# Altium PCB Shapeoko Mill.PcbDoc (part 1 of 2)
Units mil, origin at the board's own origin, x right, y up, seen from the top; angles counter-clockwise.
Board outline 6000 x 5000 mil, 2 copper layers (Top Layer, Bottom Layer); 145 components, 165 nets, 634 pads, 190 vias.
Unrouted connection lines stored in the file: 4.
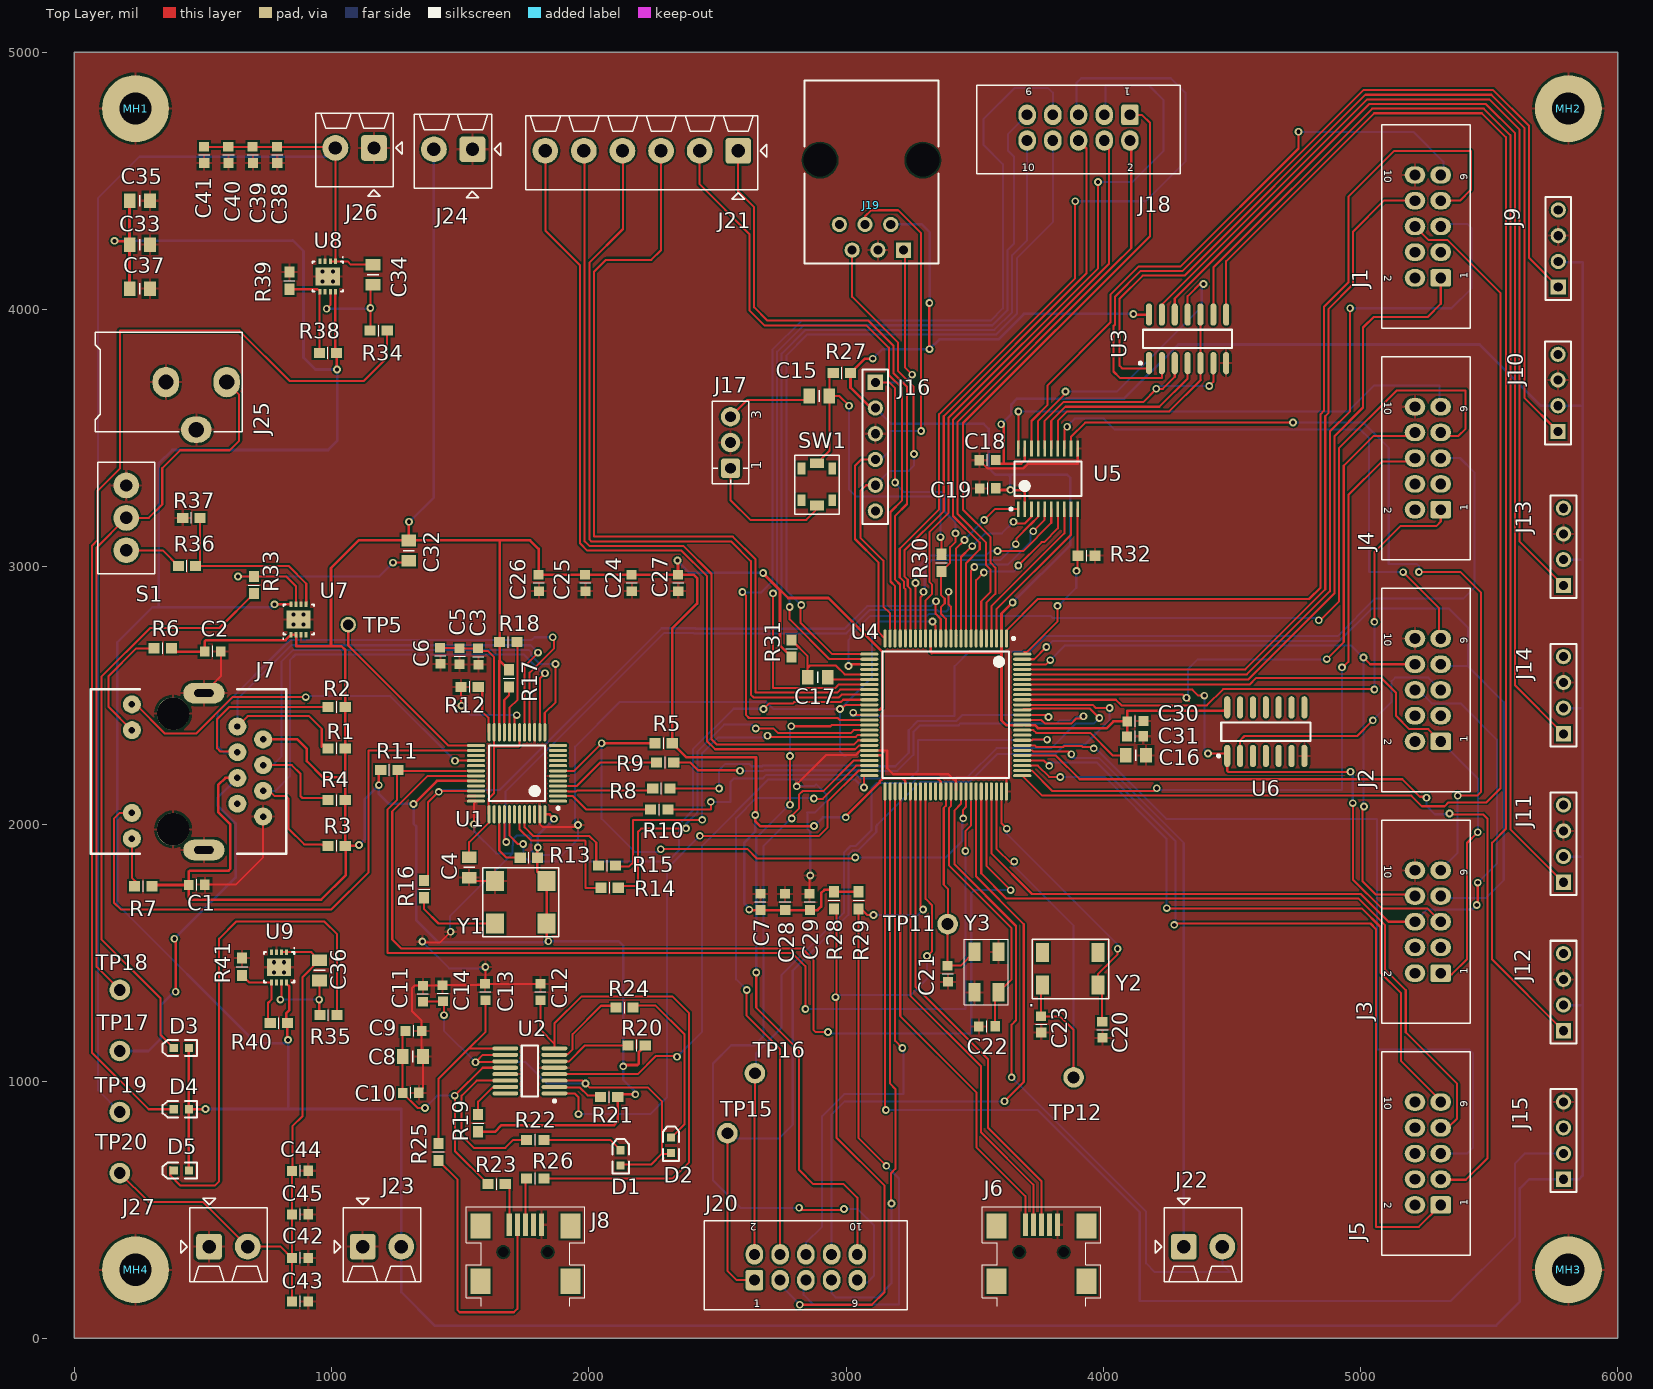
[diagram p0: Top Layer view]
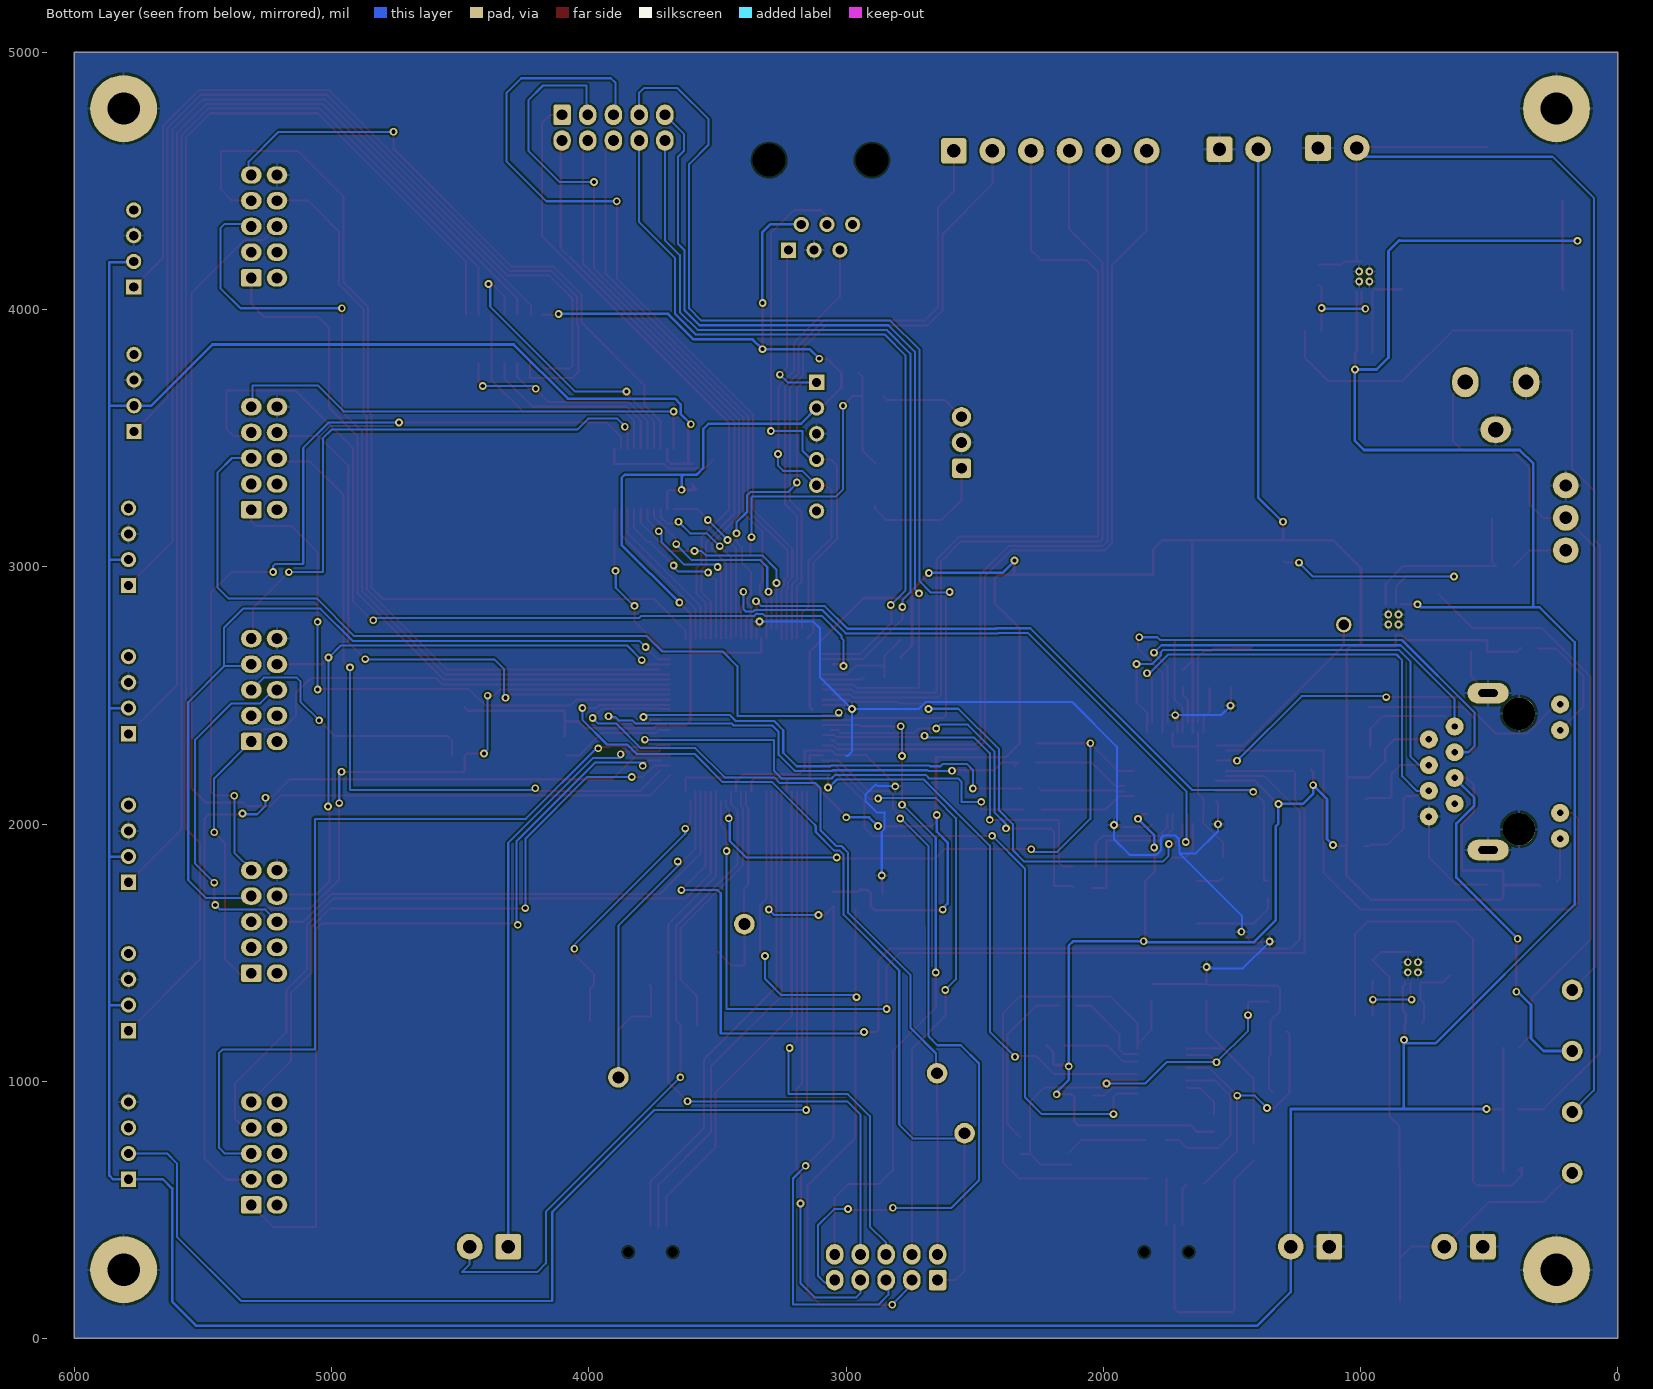
[diagram p1: Bottom Layer view, seen from below]
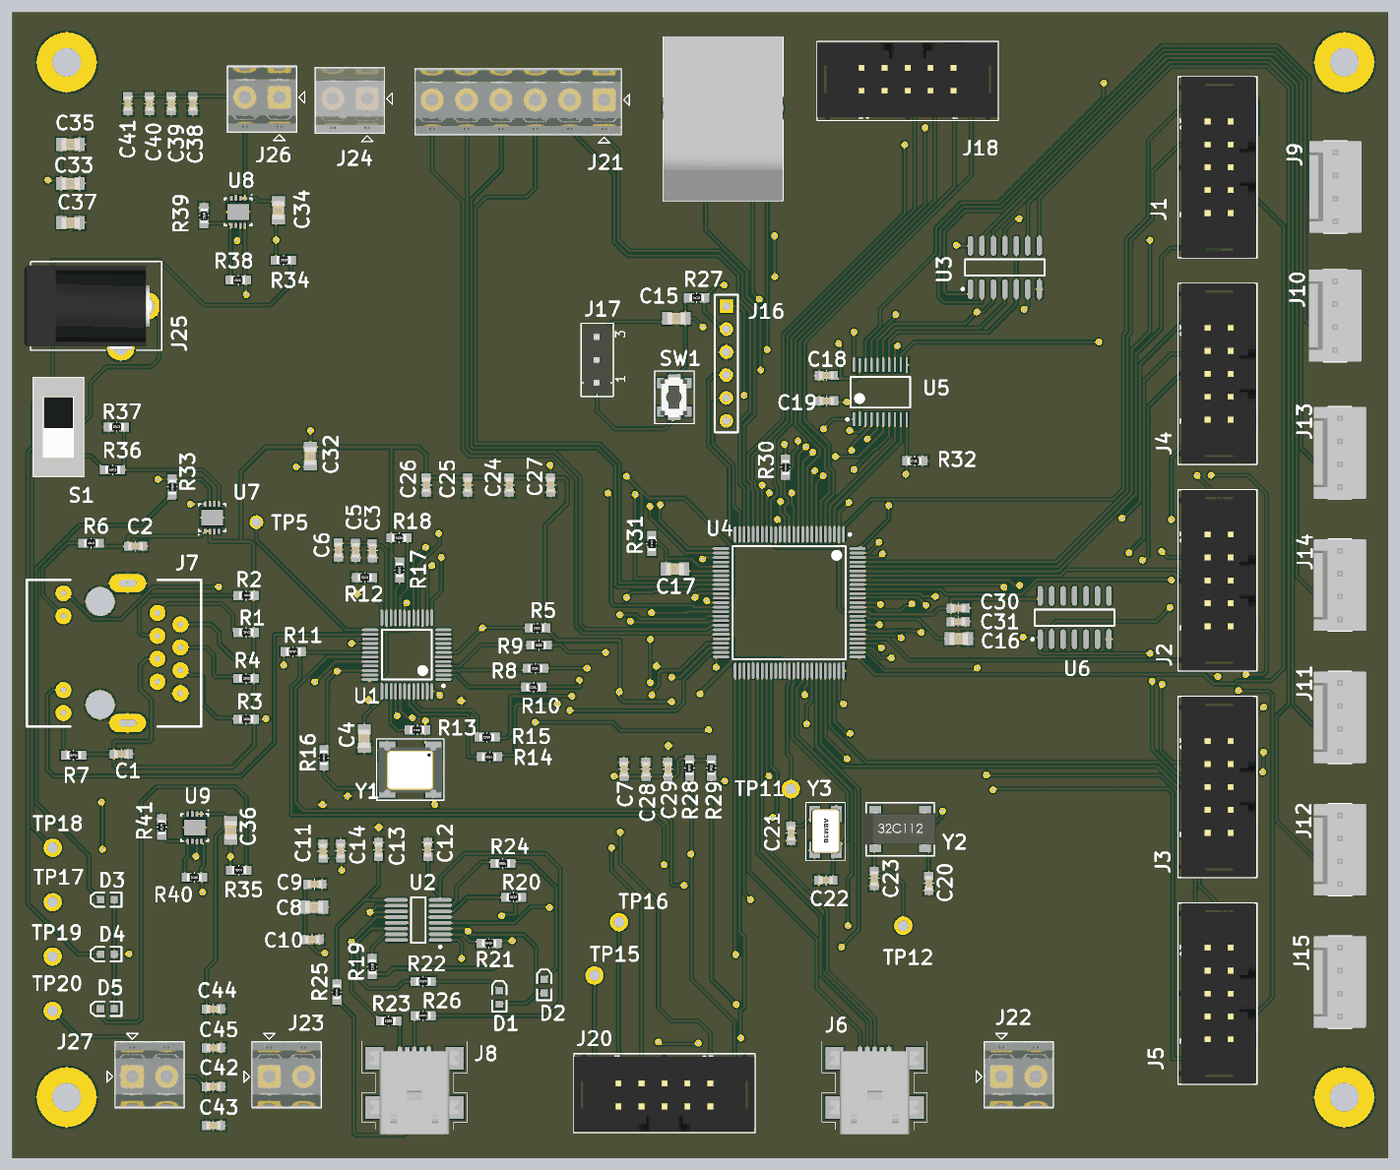
[diagram p3: 3D render of the assembled board from above, using the file's embedded part models]

## Layer stack, top to bottom
Top Solder: solder mask 0.4, Solder Resist, Dk 3.5
Top Layer: signal copper 1.4
Dielectric1: dielectric 12.6, FR-4, Dk 4.8
Bottom Layer: signal copper 1.4
Bottom Solder: solder mask 0.4, Solder Resist, Dk 3.5

## Board outline
0,0 0,5000 6000,5000 6000,0

## Design rules (kind name [scope] priority, off if disabled: settings)
Clearance [All] p1: gap=7
ComponentClearance [All] p1: gap=10 collisioncheckmode=3 verticalgap=100000 showdistances=FALSE
HoleSize [All] p1: absolutevalues=TRUE maxlimit=200 minlimit=12 maxpercent=80.000 minpercent=20.000
MinimumAnnularRing [All] p1: minimumring=7
MinimumSolderMaskSliver [All] p1 off: minsoldermaskwidth=4
PlaneConnect "Schematic Power Plane Connect Style_3" [InComponent('MH4')] p1: planeconnectstyle=Direct reliefexpansion=15 reliefentries=2 reliefconductorwidth=12 reliefairgap=10
PlaneConnect "Schematic Power Plane Connect Style_2" [InComponent('MH1')] p2: planeconnectstyle=Direct reliefexpansion=15 reliefentries=2 reliefconductorwidth=12 reliefairgap=10
PlaneConnect "Schematic Power Plane Connect Style_1" [InComponent('MH3')] p3: planeconnectstyle=Direct reliefexpansion=15 reliefentries=2 reliefconductorwidth=12 reliefairgap=10
PlaneConnect "Schematic Power Plane Connect Style" [InComponent('MH2')] p4: planeconnectstyle=Direct reliefexpansion=15 reliefentries=2 reliefconductorwidth=12 reliefairgap=10
PlaneConnect [All] p5: planeconnectstyle=Relief reliefexpansion=20 reliefentries=4 reliefconductorwidth=10 reliefairgap=10
PolygonConnect [All] p1: connectstyle=Relief reliefconductorwidth=10 reliefentries=4 polygonreliefangle="90 Angle" airgapwidth=10
RoutingVias [All] p1: holewidth=16 width=30 viastyle="Through Hole" minholewidth=12 minwidth=25 maxholewidth=28 maxwidth=50
SilkToSilkClearance [All] p1: silktosilkclearance=4
SilkToSolderMaskClearance [IsPad] p1: minsilkscreentomaskgap=4 clearancetoexposedcopper=TRUE
SolderMaskExpansion [All] p1: expansion=2
UnRoutedNet [All] p1 off:
Width Width_3v3 [InNet('3V3VCC')] p1: maxlimit=10 minlimit=10 preferedwidth=10
Width Width_5VDC [InNet('5VDC')] p2: maxlimit=10 minlimit=10 preferedwidth=10
Width [All] p3: maxlimit=15 minlimit=7 preferedwidth=8 minimp=50.000000 maximp=50.000000 favimp=50.000000
23 further rules are at their usual default settings.

## Classes and differential pairs
component class "Limit Sensor Interface": J9 J10 J11 J12 J13 J14 J15 U3
component class FTDI-USB: C1 C2 C3 C4 C5 C6 C7 C8 C9 C10 C11 C12 C13 C14 D1 D2 J6 J7 J8 R1 R2 R3 R4 R5 R6 R7 R8 R9 R10 R11 R12 R13 R14 R15 R16 R17 R18 R19 R20 R21 R22 R23 R24 R25 R26 TP5 U1 U2 Y1
component class MCU: C15 C16 C17 C18 C19 C20 C21 C22 C23 C24 C25 C26 C27 C28 C29 C30 C31 J16 J17 J18 J19 J20 J21 J22 R27 R28 R29 R30 R31 R32 SW1 TP11 TP12 TP15 TP16 U4 U5 U6 Y2 Y3
component class Power: C32 C33 C34 C35 C36 C37 C38 C39 C40 C41 C42 C43 C44 C45 D3 D4 D5 J23 J24 J25 J26 J27 R33 R34 R35 R36 R37 R38 R39 R40 R41 S1 TP17 TP18 TP19 TP20 U7 U8 U9
component class "Block Diagram": J1 J2 J3 J4 J5 MH1 MH2 MH3 MH4

## Components (designator, comment, footprint, x,y, rotation, side; value= is the part's Value field where it differs from the comment)
C1 "0.1uF" CAP_0603 476,1764 r180 top
C2 "0.1uF" CAP_0603 538,2671 r180 top
C3 "0.1uF" CAP_0603 1571,2651 r90 top
C4 "10uF" CAP_0805 1535,1831 r90 top
C5 "0.1uF" CAP_0603 1498,2652 r90 top
C6 "0.1uF" CAP_0603 1423,2654 r90 top
C7 "0.1uF" CAP_0603 2667,1697 r270 top
C8 "4.7uF" CAP_0805 1316,1096 r180 top
C9 "0.1uF" CAP_0603 1319,1196 r180 top
C10 "0.1uF" CAP_0603 1308,955 r180 top
C11 "0.1uF" CAP_0603 1355,1340 r270 top
C12 "0.047uF" CAP_0603 1812,1347 r270 top
C13 "0.047uF" CAP_0603 1597,1347 r270 top
C14 "0.1uF" CAP_0603 1432,1342 r270 top
C15 "10uF" CAP_0805 2896,3664 r180 top
C16 "10uF" CAP_0805 4127,2267 r180 top
C17 "10uF" CAP_0805 2890,2571 r180 top
C18 "0.1uF" CAP_0603 3550,3415 r180 top
C19 "0.1uF" CAP_0603 3551,3304 r0 top
C20 "11 pF" CAP_0603 3997,1200 r90 top
C21 "20pF" CAP_0603 3396,1418 r90 top
C22 "20pF" CAP_0603 3548,1213 r0 top
C23 "11 pF" CAP_0603 3759,1221 r90 top
C24 "0.1uF" CAP_0603 2167.33,2937 r90 top
C25 "0.1uF" CAP_0603 1986.67,2937 r90 top
C26 "0.1uF" CAP_0603 1806,2937 r90 top
C27 "0.1uF" CAP_0603 2348,2937 r90 top
C28 "0.1uF" CAP_0603 2762.75,1697 r270 top
C29 "0.1uF" CAP_0603 2858.5,1697 r270 top
C30 "0.1uF" CAP_0603 4125,2400 r180 top
C31 "0.1uF" CAP_0603 4124,2341 r180 top
C32 "1.0uF" CAP_0805 1300,3063 r90 top
C33 "1.0uF" CAP_0805 255,4252 r180 top
C34 "1.0uF" CAP_0805 1161.31,4135.31 r90 top
C35 "1.0uF" CAP_0805 255,4423 r180 top
C36 "1.0uF" CAP_0805 953,1431 r90 top
C37 "1.0uF" CAP_0805 255,4081 r180 top
C38 "0.1uF" CAP_0603 789,4601 r90 top
C39 "0.1uF" CAP_0603 694.33,4601 r90 top
C40 "0.1uF" CAP_0603 599.67,4601 r90 top
C41 "0.1uF" CAP_0603 505,4601 r90 top
C42 "0.1uF" CAP_0603 878,313.33 r180 top
C43 "0.1uF" CAP_0603 878,144 r180 top
C44 "0.1uF" CAP_0603 878,652 r180 top
C45 "0.1uF" CAP_0603 878,482.67 r180 top
D1 "HSMD-C190" 1.6X0.8X0.8 2124,702 r90 top
D2 "HSMD-C190" 1.6X0.8X0.8 2320,751 r90 top
D3 "HSMD-C190" 1.6X0.8X0.8 416,1129 r180 top
D4 "HSMD-C190" 1.6X0.8X0.8 416,891 r180 top
D5 "HSMD-C190" 1.6X0.8X0.8 416,653 r180 top
J1 "shrouded box header" 10P_PCB_HEADER_BRD_MNT 5262,4323 r180 top
J2 "shrouded box header" 10P_PCB_HEADER_BRD_MNT 5262,2521 r180 top
J3 "shrouded box header" 10P_PCB_HEADER_BRD_MNT 5262,1620 r180 top
J4 "shrouded box header" 10P_PCB_HEADER_BRD_MNT 5262,3422 r180 top
J5 "shrouded box header" 10P_PCB_HEADER_BRD_MNT 5262,719 r180 top
J6 "Mini-B" MUSB-05-X-B-SM-A 3760,335.5 r0 top
J7 "SI-60062-F" ETHERNET_CONN 64,2525 r270 top
J8 "Mini-B" MUSB-05-X-B-SM-A 1754,335.5 r0 top
J9 "MHDR1X4" HDR1X4 5769,4087 r90 top
J10 "MHDR1X4" HDR1X4 5768,3525.83 r90 top
J11 "MHDR1X4" HDR1X4 5789,1773.33 r90 top
J12 "MHDR1X4" HDR1X4 5789,1196.17 r90 top
J13 "MHDR1X4" HDR1X4 5789,2927.67 r90 top
J14 "MHDR1X4" HDR1X4 5789,2350.5 r90 top
J15 "MHDR1X4" HDR1X4 5789,619 r90 top
J16 "Programmer" HDR1X6 3114,3717 r270 top
J17 "1X3" 1x3POS_HEADER 2551,3483 r180 top
J18 "shrouded box header" 10P_PCB_HEADER_BRD_MNT 3904,4707 r270 top
J19 "Value" 95001-2661 3099,4891 r180 top
J20 "shrouded box header" 10P_PCB_HEADER_BRD_MNT 2844,277 r90 top
J21 "Stackable ScrewTerm" 6P_PCB_ScrewTerm_90S_3.81MM 2581,4617 r90 top
J22 "Stackable ScrewTerm" 2P_PCB_ScrewTerm_90S_3.81MM 4313,357 r270 top
J23 "Stackable ScrewTerm" 2P_PCB_ScrewTerm_90S_3.81MM 1121,357 r270 top
J24 "Stackable ScrewTerm" 2P_PCB_ScrewTerm_90S_3.81MM 1548,4623 r90 top
J25 "CONN_PWR_JACK_2.1x5.5mm" CONN_PWR_JACK_2.1x5.5mm 53,3718 r90 top
J26 "Stackable ScrewTerm" 2P_PCB_ScrewTerm_90S_3.81MM 1165,4628 r90 top
J27 "Stackable ScrewTerm" 2P_PCB_ScrewTerm_90S_3.81MM 524,357 r270 top
MH1 "MH_Plated_125mil" "MH_PLATED_125 ID X 260MIL OD" 238,4781 r90 top
MH2 "MH_Plated_125mil" "MH_PLATED_125 ID X 260MIL OD" 5808,4781 r0 top
MH3 "MH_Plated_125mil" "MH_PLATED_125 ID X 260MIL OD" 5808,267 r0 top
MH4 "MH_Plated_125mil" "MH_PLATED_125 ID X 260MIL OD" 238,267 r0 top
R1 "49.9" RES_0603 1020,2294 r0 top
R2 "49.9" RES_0603 1020,2455 r0 top
R3 "49.9" RES_0603 1020,1915 r0 top
R4 "49.9" RES_0603 1020,2093 r0 top
R5 "1.5K" RES_0603 2291,2314 r180 top
R6 "249" RES_0603 344,2683 r0 top
R7 "249" RES_0603 268,1758 r0 top
R8 "33" RES_0603 2282,2138 r180 top
R9 "33" RES_0603 2297,2239 r180 top
R10 "33" RES_0603 2274,2056 r180 top
R11 "1.5K" RES_0603 1225,2210 r0 top
R12 "4.87K" RES_0603 1537,2533 r0 top
R13 "2.2K" RES_0603 1767,1869 r180 top
R14 "33" RES_0603 2081,1752 r180 top
R15 "33" RES_0603 2071,1838 r180 top
R16 "33" RES_0603 1360,1747 r90 top
R17 "2.2K" RES_0603 1690,2566 r90 top
R18 "2.2K" RES_0603 1687,2707 r180 top
R19 "10K" RES_0603 1570,837 r270 top
R20 "10K" RES_0603 2186,1139 r0 top
R21 "10K" RES_0603 2079,938 r0 top
R22 "100" RES_0603 1792,772 r0 top
R23 "0" RES_0603 1642,600 r180 top
R24 "100" RES_0603 2139,1286 r0 top
R25 "27" RES_0603 1416,725 r90 top
R26 "27" RES_0603 1792,622 r0 top
R27 "10K" RES_0603 2984,3753 r0 top
R28 "2.2K" RES_0603 2953.25,1703 r90 top
R29 "2.2K" RES_0603 3049,1703 r90 top
R30 "470" RES_0603 3371,3015 r270 top
R31 "10" RES_0603 2788,2682 r270 top
R32 "1.0K" RES_0603 3935,3043 r180 top
R33 "100" RES_0603 698,2929 r270 top
R34 "100" RES_0603 1183,3918 r0 top
R35 "100" RES_0603 988,1257 r0 top
R36 "100K" RES_0603 438,3003 r0 top
R37 "100K" RES_0603 455,3190 r0 top
R38 "100K" RES_0603 986,3831 r180 top
R39 "100K" RES_0603 836.31,4112.31 r270 top
R40 "100K" RES_0603 795,1226 r180 top
R41 "100K" RES_0603 652,1445 r270 top
S1 "ON-ON" SWITCH_SPDT_SLIDER 202,3190 r270 top
SW1 "Value" TL1015_TACT_SWITCH 2887,3320 r90 top
TP5 "ValueValueAux" TP 1065,2775 r0 top
TP11 "TESTPOINT_LEAD" THP_D46_T80_B80 3395,1611 r90 top
TP12 "TESTPOINT_LEAD" THP_D46_T80_B80 3885,1015 r180 top
TP15 "TESTPOINT_LEAD" THP_D46_T80_B80 2539,798 r180 top
TP16 "TESTPOINT_LEAD" THP_D46_T80_B80 2646,1031 r90 top
TP17 "TESTPOINT_LEAD" THP_D46_T80_B80 177,1117.67 r270 top
TP18 "TESTPOINT_LEAD" THP_D46_T80_B80 177,1355 r270 top
TP19 "TESTPOINT_LEAD" THP_D46_T80_B80 177,880.33 r0 top
TP20 "TESTPOINT_LEAD" THP_D46_T80_B80 177,643 r0 top
U1 "DP83848CVV/NOPB" VBH48A_N 1721,2197 r180 top
U2 "FT230XS-R" SSOP-16_M 1771,1040 r180 top
U3 "CD4071BCM" M14A_N 4328,3886 r90 top
U4 "PIC32MX795F512L-80V/PF" TQFP-PF100_N 3388,2424 r270 top
U5 "TXB0108PWR" TSSOP-20 3785,3342 r90 top
U6 "CD4069UBCM" M14A_N 4632,2359 r90 top
U7 "ADP7104ACPZ-3.3-R7" ADI-CP-8-5_V 872,2795 r90 top
U8 "ADP7104ACPZ-2.5-R7" ADI-CP-8-5_V 985.31,4128.31 r270 top
U9 "ADP7104ACPZ-1.8-R7" ADI-CP-8-5_V 796,1443 r270 top
Y1 "50MHz" K50-3C 1736,1696 r180 top
Y2 "32kHz" 4-SOJ_5.5MM_PITCH 3872,1437 r0 top
Y3 "8MHz" ABM3B_XTAL 3499,1503 r270 top

## Footprints (in the part's own frame and the unit in brackets; to place one, negate y for a bottom-side part, rotate by r counter-clockwise, add the part's x,y. Pads: shape width x height; smd on the part's side, far side on the other; paste and mask are expansions set on the pad)
1.6X0.8X0.8 [mm] "SM LED; 2 Flat Leads"
  rect 0.8x0.8 smd: 1(-0.75,0) 2(0.75,0)
  silkscreen extent -1.55,-0.8 1.85,0.8
1x3POS_HEADER [mil] "Connector Header, Single-row 3-position, 0.100\" pitch"
  rrect25% 75x75 hole 42: 1(0,100)
  round 75 hole 42: 2(0,0) 3(0,-100)
  silkscreen extent -70,-160 70,160, body extent -57,-150 57,150, height 335
2P_PCB_ScrewTerm_90S_3.81MM [mil] "TERM BLOCK 2POS SIDE ENT STACKABLE 3.81MM"
  rrect25% 100x100 hole 52: 1(0,0)
  round 100 hole 52: 2(0,150)
  silkscreen extent -188,-110 136,226, body extent -152,-75 136,225, height 335
4-SOJ_5.5MM_PITCH [mm]
  rect 1.3x1.9 smd: 1(-2.75,-1.6) 2(2.75,-1.6) 3(2.75,1.6) 4(-2.75,1.6)
  silkscreen extent -3.77,-2.98 3.77,2.9, body extent -3.97,-1.85 3.93,1.85, height 2.44
6P_PCB_ScrewTerm_90S_3.81MM [mil] "TERM BLOCK 6POS SIDE ENT STACKABLE 3.81MM"
  rrect25% 100x100 hole 52: 1(0,0)
  round 100 hole 52: 2(0,150) 3(0,300) 4(0,450) 5(0,600) 6(0,750)
  silkscreen extent -188,-110 136,825, body extent -152,-75 136,825, height 335
10P_PCB_HEADER_BRD_MNT [mil] "HEADER BRD MNT 10POS 2.54MM"
  round 40 on Mech15: 0(0,0)
  rrect25% 80x68 hole 42: 1(-50,200)
  oval 80x68 hole 42: 2(50,200) 3(-50,100) 4(50,100) 5(-50,0) 6(50,0) 7(-50,-100) 8(50,-100) 9(-50,-200) 10(50,-200)
  silkscreen extent -165,-395 180,395, body extent -162,-394 178,394, height 390
95001-2661 [mm] "Connector; PCB Jack, Thru-Hole; 1-Port, 6 Positions, 6 Loaded; Unshielded without Lightpipes; Right Angle"
  rect 1.5x1.5 hole 0.9: 1(-3.175,16.77)
  round 1.5 hole 0.9: 2(-1.905,14.23) 3(-0.635,16.77) 4(0.635,14.23) 5(1.905,16.77) 6(3.175,14.23)
  round 2.95 hole 3.25 unplated: MH1(-5.08,7.88) MH2(5.08,7.88)
  silkscreen extent -6.6,0 6.6,18.1, body extent -6.67,-0.05 6.67,18.11, height 12.57
ABM3B_XTAL [mm]
  rect 1.8x1.2 smd: 1(0,0) 2(4,0) 3(4,2.4) 4(0,2.4)
  silkscreen extent -1.25,-0.97 5.2,3.35, body extent -0.59,-0.38 4.4,2.82, height 1.11
ADI-CP-8-5_V [mm] "SON, 8-Leads, Body 3x3mm, Pitch 0.5mm, Thermal Pad 1.74x2.38mm"
  rect 0.55x0.3 smd mask+0.102: 1(-1.5,0.75) 2(-1.5,0.25) 3(-1.5,-0.25) 4(-1.5,-0.75) 5(1.5,-0.75) 6(1.5,-0.25) 7(1.5,0.25) 8(1.5,0.75)
  rect 1.74x2.38 smd mask+0.102: 9(0,0)
  silkscreen extent -1.95,-1.5 1.5,1.55, body extent -1.5,-1.5 1.5,1.5, height 0.8
CAP_0603 [mm]
  rect 0.95x1 smd: 1(-0.8,0) 2(0.8,0.025)
  silkscreen extent 0,-0.55 0,0.55, body extent -0.8,-0.39 0.8,0.41, height 0.82
CAP_0805 [mm]
  rect 1.15x1.45 smd: 1(-1,0) 2(1,0)
  silkscreen extent 0,-0.55 0,0.55, body extent -1,-0.61 1,0.64, height 0.62
CONN_PWR_JACK_2.1x5.5mm [mm] "Power Connector, 2.1mm ID, 5.5mm OD"
  oval 3x2.6 hole 1.511: 1(0,-13.7) 2(0,-7.7)
  oval 2.6x3 hole 1.511: 3(-4.7,-10.7)
  silkscreen extent -4.9,-15.22 4.92,-0.7, body extent -4.9,-14.1 4.5,0, height 11
ETHERNET_CONN [mil]
  round 70 hole 25: 1(146,570) 2(196,670) 3(246,570) 4(296,670) 5(346,570) 6(396,670) 7(446,570) 8(496,670) 9(60,160) 10(160,160) 11(482,160) 12(582,160)
  oval 80x160 hole 30 slot 75 at 90 deg: 13(16,440) 14(626,440)
  round 126 hole 126: MH(96,320) MH(546,320)
  silkscreen extent 1,0 641,760
HDR1X4 [mm] "Connector; Header; 4 Position"
  rect 1.5x1.5 hole 0.9: 1(0,0)
  round 1.5 hole 0.9: 2(2.54,0) 3(5.08,0) 4(7.62,0)
  silkscreen extent -1.27,-1.27 8.89,1.27, body extent -1.27,-2.9 8.89,2.9, height 11.64
HDR1X6 [mm] "Connector; Header; 6 Position"
  rect 1.5x1.5 hole 0.9: 1(0,0)
  round 1.5 hole 0.9: 2(2.54,0) 3(5.08,0) 4(7.62,0) 5(10.16,0) 6(12.7,0)
  silkscreen extent -1.27,-1.27 13.97,1.27
K50-3C [mm]
  rect 1.8x2 smd: 1(-2.54,-2.1) 2(2.54,-2.1) 3(2.54,2.1) 4(-2.54,2.1)
  silkscreen extent -3.72,-3.4 3.75,3.4, body extent -3.5,-2.45 3.5,2.55, height 1.51
M14A_N [mm] "SOIC, 14-Leads, Body 8.6x3.9mm, Pitch 1.27mm, IPC Medium Density"
  oval 2.2x0.6 smd: 1(-2.4,3.81) 2(-2.4,2.54) 3(-2.4,1.27) 4(-2.4,0) 5(-2.4,-1.27) 6(-2.4,-2.54) 7(-2.4,-3.81) 8(2.4,-3.81) 9(2.4,-2.54) 10(2.4,-1.27) 11(2.4,0) 12(2.4,1.27) 13(2.4,2.54) 14(2.4,3.81)
  silkscreen extent -2.52,-4.4 0.9,4.78, body extent -2,-4.38 2,4.38, height 1.75
"MH_PLATED_125 ID X 260MIL OD" [mil]
  round 260 hole 125: MH(0,0)
MUSB-05-X-B-SM-A [mm]
  rect 0.5x2.25 smd mask+0.05: 1(-1.6,2.708) 2(-0.8,2.708) 3(0,2.708) 4(0.8,2.708) 5(1.6,2.708)
  rect 2x2.5 smd mask+0.05: 6(-4.45,2.583) 7(-4.45,-2.867) 8(4.45,2.583) 9(4.45,-2.867)
  round 0 hole 1 unplated: 10(-2.2,0.008) 11(2.2,0.008)
  silkscreen extent -5.83,-5.34 5.83,4.47, body extent -4.95,-5.84 4.95,3.66, height 4.03
RES_0603 [mm]
  rect 1.1x1 smd: 1(-0.85,0) 2(0.85,0)
  silkscreen extent 0,-0.55 0,0.55, body extent -0.77,-0.37 0.83,0.43, height 0.47
SSOP-16_M [mm] "SOP, 16-Leads, Body 4.9x3.9mm, Pitch 0.635mm, IPC Low Density"
  oval 2.55x0.4 smd: 1(-2.425,2.222) 2(-2.425,1.587) 3(-2.425,0.952) 4(-2.425,0.317) 5(-2.425,-0.318) 6(-2.425,-0.953) 7(-2.425,-1.588) 8(-2.425,-2.223) 9(2.425,-2.222) 10(2.425,-1.587) 11(2.425,-0.952) 12(2.425,-0.317) 13(2.425,0.318) 14(2.425,0.953) 15(2.425,1.588) 16(2.425,2.223)
  silkscreen extent -2.55,-2.5 0.8,3.1, body extent -1.99,-2.5 1.99,2.5, height 1.76
SWITCH_SPDT_SLIDER [mil] "TE Connectivity SLS121PC04 SPDT slider"
  round 100 hole 48: 1(-126,0) 2(0,0) 3(126,0)
  silkscreen extent -217,-110 217,110, body extent -216,-110 217,110, height 394
THP_D46_T80_B80 [mil]
  round 80 hole 46: 1(0,0)
TL1015_TACT_SWITCH [mm]
  rect 0.95x1.4 smd: 1(-2.075,0) 2(2.075,0)
  rect 1.15x0.75 smd: G(-1.575,-1.525) G(-1.575,1.525) G(1.575,-1.525) G(1.575,1.525)
  silkscreen extent -2.93,-2.2 2.9,2.17, body extent -2.2,-1.45 2.2,1.55, height 1.8
TP [mil] "Test Point"
  round 60 hole 40: 1(0,0)
TQFP-PF100_N [mm] "Thin QFP, 100-Leads, Body 14x14mm, Pitch 0.5mm, IPC Medium Density"
  oval 1.8x0.3 smd: 1(-7.55,6) 2(-7.55,5.5) 3(-7.55,5) 4(-7.55,4.5) 5(-7.55,4) 6(-7.55,3.5) 7(-7.55,3) 8(-7.55,2.5) 9(-7.55,2) 10(-7.55,1.5) 11(-7.55,1) 12(-7.55,0.5) 13(-7.55,0) 14(-7.55,-0.5) 15(-7.55,-1) 16(-7.55,-1.5) 17(-7.55,-2) 18(-7.55,-2.5) 19(-7.55,-3) 20(-7.55,-3.5) 21(-7.55,-4) 22(-7.55,-4.5) 23(-7.55,-5) 24(-7.55,-5.5) 25(-7.55,-6) 51(7.55,-6) 52(7.55,-5.5) 53(7.55,-5) 54(7.55,-4.5) 55(7.55,-4) 56(7.55,-3.5) 57(7.55,-3) 58(7.55,-2.5) 59(7.55,-2) 60(7.55,-1.5) 61(7.55,-1) 62(7.55,-0.5) 63(7.55,0) 64(7.55,0.5) 65(7.55,1) 66(7.55,1.5) 67(7.55,2) 68(7.55,2.5) 69(7.55,3) 70(7.55,3.5) 71(7.55,4) 72(7.55,4.5) 73(7.55,5) 74(7.55,5.5) 75(7.55,6)
  oval 0.3x1.8 smd: 26(-6,-7.55) 27(-5.5,-7.55) 28(-5,-7.55) 29(-4.5,-7.55) 30(-4,-7.55) 31(-3.5,-7.55) 32(-3,-7.55) 33(-2.5,-7.55) 34(-2,-7.55) 35(-1.5,-7.55) 36(-1,-7.55) 37(-0.5,-7.55) 38(0,-7.55) 39(0.5,-7.55) 40(1,-7.55) 41(1.5,-7.55) 42(2,-7.55) 43(2.5,-7.55) 44(3,-7.55) 45(3.5,-7.55) 46(4,-7.55) 47(4.5,-7.55) 48(5,-7.55) 49(5.5,-7.55) 50(6,-7.55) 76(6,7.55) 77(5.5,7.55) 78(5,7.55) 79(4.5,7.55) 80(4,7.55) 81(3.5,7.55) 82(3,7.55) 83(2.5,7.55) 84(2,7.55) 85(1.5,7.55) 86(1,7.55) 87(0.5,7.55) 88(0,7.55) 89(-0.5,7.55) 90(-1,7.55) 91(-1.5,7.55) 92(-2,7.55) 93(-2.5,7.55) 94(-3,7.55) 95(-3.5,7.55) 96(-4,7.55) 97(-4.5,7.55) 98(-5,7.55) 99(-5.5,7.55) 100(-6,7.55)
  silkscreen extent -7.67,-6.25 6.25,6.83, body extent -7,-7 7,7, height 1.6
TSSOP-20 [mm]
  rect 1.55x0.25 smd: 1(-3.001,2.921) 2(-3.001,2.271) 3(-3.001,1.621) 4(-3.001,0.971) 5(-3.001,0.321) 6(-3.001,-0.329) 7(-3.001,-0.979) 8(-3.001,-1.629) 9(-3.001,-2.279) 10(-3.001,-2.929) 11(2.999,-2.929) 12(2.999,-2.279) 13(2.999,-1.629) 14(2.999,-0.979) 15(2.999,-0.329) 16(2.999,0.321) 17(2.999,0.971) 18(2.999,1.621) 19(2.999,2.271) 20(2.999,2.921)
  silkscreen extent -3.13,-3.3 1.7,3.77, body extent -2.25,-3.3 2.25,3.3, height 1.2
VBH48A_N [mm] "Thin QFP, 48-Leads, Body 7x7mm, Pitch 0.5mm, IPC Medium Density"
  oval 1.8x0.3 smd: 1(-4.05,2.75) 2(-4.05,2.25) 3(-4.05,1.75) 4(-4.05,1.25) 5(-4.05,0.75) 6(-4.05,0.25) 7(-4.05,-0.25) 8(-4.05,-0.75) 9(-4.05,-1.25) 10(-4.05,-1.75) 11(-4.05,-2.25) 12(-4.05,-2.75) 25(4.05,-2.75) 26(4.05,-2.25) 27(4.05,-1.75) 28(4.05,-1.25) 29(4.05,-0.75) 30(4.05,-0.25) 31(4.05,0.25) 32(4.05,0.75) 33(4.05,1.25) 34(4.05,1.75) 35(4.05,2.25) 36(4.05,2.75)
  oval 0.3x1.8 smd: 13(-2.75,-4.05) 14(-2.25,-4.05) 15(-1.75,-4.05) 16(-1.25,-4.05) 17(-0.75,-4.05) 18(-0.25,-4.05) 19(0.25,-4.05) 20(0.75,-4.05) 21(1.25,-4.05) 22(1.75,-4.05) 23(2.25,-4.05) 24(2.75,-4.05) 37(2.75,4.05) 38(2.25,4.05) 39(1.75,4.05) 40(1.25,4.05) 41(0.75,4.05) 42(0.25,4.05) 43(-0.25,4.05) 44(-0.75,4.05) 45(-1.25,4.05) 46(-1.75,4.05) 47(-2.25,4.05) 48(-2.75,4.05)
  silkscreen extent -4.18,-2.75 2.75,3.57, body extent -3.5,-3.5 3.5,3.5, height 1.6

## Part data
C1 C2 C3 C5 C6 C7 C9 C10 C11 C14 C18 C19 C24 C25 C26 C27 C28 C29 C30 C31 C38 C39 C40 C41 C42 C43 C44 C45: library part C0603C104K4RACTU, "CAP CER 0.1UF 16V 10% X7R 0603"
C4 C15 C16 C17: library part C0805C106K9PACTU, "CAP CER 10UF 6.3V 10% X5R 0805"
C8: library part C0805C475K8PACTU, "CAP CER 4.7UF 10V 10% X5R 0805"
C12 C13: library part C0603C473K3RACTU, "CAP CER 0.047UF 25V 10% X7R 0603"
C20 C23: library part CBR06C110JAGAC, "CAP CER 11PF 250V 5% NP0 0603"
C21 C22: library part C0603C200J5GACTU, "CAP CER 20PF 50V 5% NP0 0603"
C32 C33 C34 C35 C36 C37: library part C0805C105K4RACTU, "CAP CER 1UF 16V 10% X7R 0805"
D1 D2 D3 D4 D5: "Surface Mount Chip LED, Orange"
J1 J2 J3 J4 J5 J18 J20: library part CONN_HEADER_2x5P_0.100in_Male, "Header THD 10 POS Double-row 2.54mm pitch"
J6 J8: library part MUSB-05-F-B-SM-A, "CONN RECEPT USB MINI B SMD R/A"
J7: "CONN MAGJACK 1PORT 100 BASE-T"
J9 J10 J11 J12 J13 J14 J15: "Header, 4-Pin"
J16: library part Header6P, "Header, 6-pin"
J17: library part CONN_HEADER_1x3P_0.100in, "Pin Header, THT, Single-row, 2.54mm pitch"
J19: library part 5555165-1, "CONN MOD JACK R/A 6P6C"
J21: library part 6P_ScrewTerm_90S_3.81MM, "Terminal Block, THT, 6-Position screwterm, 3.81mm pitch"
J22 J23 J24 J26 J27: library part 2P_ScrewTerm_90S_3.81MM, "Terminal Block Screw Type THT 2-Position 3.81mm pitch"
J25: "Power Connector, THT, 2.1mm ID, 5.5mm OD"
R1 R2 R3 R4: library part ERJ-3EKF49R9V, "RES 49.9 OHM 1/10W 1% 0603 SMD"
R5 R11: library part ERJ-3GEYJ152V, "RES 1.5K OHM 1/10W 5% 0603 SMD"
R6 R7: library part ERJ-3EKF2490V, "RES 249 OHM 1/10W 1% 0603 SMD"
R8 R9 R10 R14 R15 R16: library part ERJ-3GEYJ330V, "RES 33 OHM 1/10W 5% 0603 SMD"
R12: library part ERJ-3EKF4871V, "RES 4.87K OHM 1/10W 1% 0603 SMD"
R13 R17 R18 R28 R29: library part ERJ-3GEYJ222V, "RES 2.2K OHM 1/10W 5% 0603 SMD"
R19 R20 R21 R27: library part ERJ-3GEYJ103V, "RES 10K OHM 1/10W 5% 0603 SMD"
R22 R24 R33 R34 R35: library part ERJ-3GEYJ101V, "RES 100 OHM 1/10W 5% 0603 SMD"
R23: library part ERJ-3GEY0R00V, "RES 0.0 OHM 1/10W JUMP 0603 SMD"
R25 R26: library part ERJ-3GEYJ270V, "RES 27 OHM 1/10W 5% 0603 SMD"
R30: library part ERJ-3GEYJ471V, "RES 470 OHM 1/10W 5% 0603 SMD"
R31: library part ERJ-3GEYJ100V, "RES 10 OHM 1/10W 5% 0603 SMD"
R32: library part ERJ-3GEYJ102V, "RES 1K OHM 1/10W 5% 0603 SMD"
R36 R37 R38 R39 R40 R41: library part ERJ-3GEYJ104V, "RES 100K OHM 1/10W 5% 0603 SMD"
S1: library part SW_THD_SPDT_On-On, "Switch THD vertical toggle SPDT"
SW1: library part TL1015AF160QG, "SWITCH TACTILE SPST-NO 0.05A 12V"
TP5: library part TP, "=Description"
TP11 TP12 TP15 TP16 TP17 TP18 TP19 TP20: "TEST POINT"
U1: "PHYTER® Commercial Temperature Single Port 10/100 Mb/s Ethernet Physical Layer Transceiver, 48-pin LQFP, Pb-Free, 250 Tray"
U2: "IC USB SERIAL BASIC UART 16SSOP"
U3: "Quad 2-Input OR Buffered B series Gate, 14-Pin SOIC"
U4: "High Performance 80 MHz MIPS-Based 32-Bit Flash Microcontroller with USB, CAN and Ethernet, 512KB Program Memory, 100-pin TQFP, V-Temperature"
U5: "IC 8-BIT TRNSTR 15KV ESD 20TSSOP"
U6: "Hex Inverter, 14-Pin SOIC"
U7: "500 mA, Low Noise, CMOS LDO, 3.3 to 20 V Vin, 3.3 V Vout, Industrial, 8-pin SON (CP-8-5), Reel"
U8: "500 mA, Low Noise, CMOS LDO, 3.3 to 20 V Vin, 2.5 V Vout, Industrial, 8-pin SON (CP-8-5), Reel"
U9: "500 mA, Low Noise, CMOS LDO, 3.3 to 20 V Vin, 1.8 V Vout, Industrial, 8-pin SON (CP-8-5), Reel"
Y1: library part K50-3C0SE50.0000MR, "OSC XO 50.000MHZ CMOS SMD"
Y2: library part CM250C-32.000KAZFT, "CRYSTAL 32KHZ 12.5PF SMD"
Y3: library part ABM3B-8.000MHZ-B2-T, "CRYSTAL 8MHZ 18PF SMD"

## Via types
v1: diameter 30, hole 16, Top Layer to Bottom Layer, 190 vias

## Nets (pads, with @x,y where several pads share a name; then routed paths per layer and width w, separated by ;. In a path a pad name is that pad's centre, name@x,y a point inside that pad or via, vN(x,y) a via of type N, cw(c..) or ccw(c..) an arc to the next point about the centre after c; other vN are vias at no path point)
1V8VCC: C36.2 C42.2 C43.2 C44.2 C45.2 J27.2 TP20.1 U9.1 U9.2 | length 2338.2
  Top Layer w8: TP20.1@177,643 289,531 500,531 J27.2@674,357 801.84,357 C42.2@846.5,312.33 ; U9.2@805.84,1502.06 U9.1@825.53,1502.06 827.94,1502.06 828,1502 921.37,1502 C36.2@953,1470.37 888,1405.37 888,865 848,825 848,652.5 C44.2@846.5,651 C45.2@846.5,481.67 C42.2@846.5,312.33 ; C43.2@846.5,143 C42.2@846.5,312.33
2V5VCC: C34.2 C38.2 C39.2 C40.2 C41.2 J26.2 TP19.1 U8.1 U8.2 | length 5715.7
  Top Layer w8: C41.2@504,4632.5 C40.2@598.67,4632.5 C39.2@693.33,4632.5 C38.2@788,4632.5 1010.5,4632.5 J26.2@1015,4628 U8.1@1015,4187.37 ; U8.2@995.16,4187.37 U8.1@1014.84,4187.37 U8.1@1015,4187.37 ; C34.2@1161.31,4174.69 1075.21,4174.69 1062.52,4187.37 U8.1@1015,4187.37
  Bottom Layer w8: TP19.1@177,880.33 93,964.33 93,4434 253,4594 981,4594 J26.2@1015,4628
3V3OUT: C11.2 C14.2 D1.1 D2.1 U2.3 U2.10 U2.11 | length 1937.3
  Top Layer w8: C11.2@1356,1308.5 1358,1310.5 C14.2@1433,1310.5 1437,1306.5 v1(1437,1257) ; v1(1560,1074) 1560.37,1074.37 1672.4,1074.37 U2.11@1675.53,1077.5 ; v1@1563.5,1077.5 1588.5,1102.5 U2.10@1675.53,1102.5 ; U2.3@1866.47,1002.5 1976.04,1002.5 2002.54,976 2230,976 2284,922 2284,717 ; D1.1@2124,676 2242,676 2283.47,717.47 D2.1@2320,717.47
  Bottom Layer w8: v1(1437,1257) 1437,1197 v1(1560,1074) 1754,1074 1837,991 v1(1987.54,991)
3V3VCC: C1.2 C2.2 C7.2 C19.2 C24.2 C25.2 C26.2 C27.2 C28.2 C29.2 C30.2 C31.2 C32.2 J7.2 J7.5 J16.2 J19.2 J24.2 R1.2 R2.2 R3.2 R4.2 R5.1 R6.2 R7.2 R11.1 R13.1 R17.2 R18.2 R19.2 R20.2 R21.2 R27.2 R28.2 R29.2 R31.2 TP17.1 U1.22 U1.32 U1.48 U3.14 U4.2 U4.16 U4.37 U4.46 U4.55 U4.62 U4.86 U5.2 U6.14 U7.1 U7.2 Y1.1 Y1.4 | length 23964.5
  Top Layer w10: R7.2@301.46,1758 306.46,1763 C1.2@444.5,1763 ; R6.2@377.46,2683 390.46,2670 C2.2@506.5,2670 506.5,2709.5 512,2715 821.53,2715 U7.1@842.47,2735.94 U7.2@860.94,2735.94 ; v1(389,1554) 394,1549 v1(394,1348) ; J7.5@634,2179 587,2179 559,2151 559,2046 607,1998 607,1826 600,1819 449,1819 444.5,1814.5 C1.2@444.5,1763 ; J7.2@734,2329 867,2329 904,2292 904,2244 967,2181 1046,2181 ; U7.2@862.16,2735.94 862.16,2691 1001,2691 ; v1(1107,1918) 1104,1915 R3.2@1053.46,1915 ; v1(1184,2151) 1184,2202.46 R11.1@1191.54,2210 ; v1(1301,3175) 1301,3103.37 C32.2@1300,3102.37 ; v1(1319,2078) 1320,2078 1409.47,2167.47 U1.32@1561.55,2167.47 ; R19.2@1570,803.54 1635.54,803.54 1661,829 2099,829 2112.46,842.46 R21.2@2112.46,938 2123.46,949 v1(2181,949) ; U1.22@1652.1,2356.45 1652.1,2634.5 1653.54,2635.93 ; R17.2@1690,2599.46 1653.54,2635.93 ; v1(1802,1909) 1802,1913 1800.46,1914.54 R13.1@1800.46,1869 1800.46,1814.21 Y1.1@1836,1778.68 Y1.4@1836,1613.32 1836,1551 v1(1843,1544) ; U1.48@1830.49,2037.55 1847.45,2037.55 v1(1865,2020) ; v1(2134,1058) 2139,1063 2189,1063 2195,1069 2195,1114.54 R20.2@2219.46,1139 ; v1(2345,3024) 2347,3022 C27.2@2347,2968.5 ; v1@2629.5,1665.5 C7.2@2668,1665.5 C28.2@2763.75,1665.5 C29.2@2859.5,1665.5 2889.5,1665.5 2903,1679 2903,1731 2916,1744 2945.71,1744 R28.2@2953.25,1736.46 R29.2@3049,1736.46 ; R31.2@2788,2648.54 2743.5,2693.04 2743.5,2907.94 2678,2973.44 v1(2678,2976) 2775.5,2878.5 2931.57,2878.5 3141.19,2668.88 3141.19,2454.71 3130.24,2443.76 ; v1(2876,1992) 2666,1992 2647,2011 v1(2647,2035) 2650,2038 2650,2259 2379.46,2259 R5.1@2324.46,2314 2324.46,2760.46 2421,2857 2421,2956 2408.5,2968.5 C27.2@2347,2968.5 ; v1(2999,2026) 2998,2027 2997,2027 3130.87,2160.87 3130.87,2164.94 3141.19,2175.26 ; U4.46@3090.76,2266.52 3141.19,2266.52 3141.19,2175.26 ; v1(3104,3809) 3073.46,3809 R27.2@3017.46,3753 3017.46,3696.54 3097,3617 J16.2@3114,3617 ; U4.55@3230.52,2126.76 3230.52,2166.16 3219.49,2177.19 ; v1(3324,4025) 3324,3847 v1(3325,3846) ; 3328.94,2672 3328.94,2671.94 ; U4.16@3328.94,2721.24 3328.94,2673.06 3330,2672 3329,2671 3328.94,2671 ; U4.62@3368.32,2126.76 3368.32,2165.06 3356.19,2177.19 3219.49,2177.19 ; v1(3639,3299) 3595.29,3299 3595.29,3317.8 C19.2@3582.5,3305 3589.3,3298.2 3686,3298.2 3695.6,3288.6 U5.2@3695.6,3223.83 ; v1(3648,2861) 3604.54,2817.54 U4.2@3604.54,2721.24 3604.54,2675.54 ; U4.86@3685.24,2384.63 3622.37,2384.63 3604.54,2402.46 3604.54,2675.54 ; U4.86@3699,2384 3735,2384 3746,2373 4014,2373 4040,2399 C30.2@4093.5,2399 ; C31.2@4093.5,2341 C30.2@4093.5,2399 ; v1(4117,3983) 4111,3983 4108.49,3980.49 U3.14@4178,3980.49 ; U6.14@4482,2453.49 4468.02,2439.5 4093.5,2439.5 C30.2@4093.5,2399 ; C1.2@444.5,1763 444.5,1715.5 454,1706 960,1706 1056,1802 1056,1912.46 R3.2@1053.46,1915 ; 1001,2691 1038,2691 1053.46,2675.54 R2.2@1053.46,2455 R1.2@1053.46,2294 R4.2@1053.46,2093 R3.2@1053.46,1915 ; 1001,2691 998,2694 998,2995 1105.37,3102.37 C32.2@1300,3102.37 ; C32.2@1300,3102.37 1654,3102.37 ; 1653.54,2635.93 R18.2@1653.54,2707 1653.54,3101.91 1654,3102.37 ; 1654,3102.37 1771.63,3102.37 1805,3069 C26.2@1805,2968.5 C25.2@1985.67,2968.5 C24.2@2166.33,2968.5 C27.2@2347,2968.5 ; 3141.19,2175.26 3143.12,2177.19 3219.49,2177.19 ; 3328.94,2671 3328,2671 3328.94,2671.94 ; 3328.94,2671 3328.94,2671.94 ; 3328.94,2671 3328.94,2669.06 3334,2664 3335,2665 3594,2665 3604.54,2675.54
  Bottom Layer w10: TP17.1@177,1117.67 287.67,1117.67 337,1167 337,1296 394,1353 v1(394,1348) ; v1(389,1554) 627,1792 627,2002 557,2072 557,2102 J7.5@634,2179 J7.5@632,2181 ; v1(1107,1918) 1130,1941 1130,2097 v1(1184,2151) 1184,2117 1223,2078 v1(1319,2078) 1319,2001 1330,1990 1330,1625 1414,1541 v1@1843,1541 ; v1(1301,3175) 1304,3175 1398,3269 J24.2@1398,4623 ; v1(1802,1909) 1802,1957 v1(1865,2020) ; v1(1843,1544) 2117,1544 2134,1527 2134,1005 2185,954 2181,950 v1(2181,949) ; v1(2345,3024) 2343,3024 2391,2976 v1(2678,2976) ; v1(2624,1667) 2624,1672 2605,1691 2605,1927.87 2647,1969.87 v1(2647,2035) ; v1(2876,1992) 2910,2026 v1(2999,2026) ; v1(3104,3809) 3141,3846 v1(3325,3846) 3363,3884 3592.24,3884 3691.24,3983 v1(4117,3983) ; J16.2@3114,3617 3175,3556 3535,3556 3555,3536 3555,3384 3580,3359 3580,3358 3630,3358 ; J19.2@3174,4330.76 3295.24,4330.76 3325,4301 3325,4026 v1(3324,4025) ; v1(3639,3299) 3639,3349 3630,3358 ; v1(3648,2861) 3872,3085 3872,3346 3860,3358 3630,3358
5V3V_ENA: R32.2 U4.100 U5.10 | length 646.1
  Top Layer w8: 3693,2668.2 3703.2,2668.2 3822,2787 v1(3822,2848) ; U5.10@3900.32,3223.83 3900.32,2989.75 v1@3901.54,2988.54
  Bottom Layer w8: v1@3823.5,2846.5 3895,2918 v1@3895,2988
  other v1: 3896,2984
5VDC: C18.1 C33.2 C35.2 C37.2 D3.1 D4.1 D5.1 J9.2 J10.2 J11.2 J12.2 J13.2 J14.2 J15.1 J23.2 R38.1 R40.1 U5.19 U7.8 U8.8 U9.8 | length 20639.8
  Top Layer w10: v1@156,4265 C33.2@214.63,4265 ; C37.2@214.63,4078 C33.2@214.63,4265 ; C35.2@214.63,4423 C33.2@214.63,4265 ; D5.1@445.53,653 D4.1@445.53,891 ; D3.1@445.53,1129 D4.1@445.53,891 ; v1@509,891 D4.1@445.53,891 ; v1@776.06,2854.06 U7.8@842.47,2854.06 ; R40.1@823.53,1224.94 823.53,1263.69 836,1276.16 836,1367.47 825.53,1377.94 U9.8@825.53,1383.94 ; v1@828.46,1163.54 R40.1@828.46,1226 ; R38.1@1014.84,3835.62 U8.8@1014.84,4069.26 ; v1@1019.46,3768.46 R38.1@1019.46,3831 ; C18.1@3595.5,3401 3681,3401 3695.6,3415.6 U5.19@3695.6,3460.06 ; v1(3603,3554) 3613,3544 3613,3401
  Bottom Layer w10: v1(156,4267) 845,4267 848,4270 891,4227 891,3813 937,3767 v1(1021,3767) ; v1(510,892) 832,892 ; v1(778,2854) 766,2842 328,2842 ; v1@1023,3767 1023,3490 987,3454 381,3454 328,3401 328,2842 ; v1(3603,3554) 3642.5,3593.5 3642.5,3631.5 3664.5,3653.5 4081.5,3653.5 4292,3864 5463,3864 5701.17,3625.83 J10.2@5768,3625.83 5864,3625.83 ; J9.2@5769,4187 5773,4183 5864,4183 5864,3625.83 ; J12.2@5789,1296.17 5864,1296.17 ; J11.2@5789,1873.33 5864,1873.33 ; J14.2@5789,2450.5 5864,2450.5 ; J13.2@5789,3027.67 5864,3027.67 ; 328,2842 303,2842 167,2706 167,1688 707,1148 831,1148 831,893 832,892 ; 832,892 1271,892 J23.2@1271,357 1271,180 1401,50 5527,50 5620,143 5620,583 5656,619 J15.1@5789,619 5850,619 5864,633 5864,1296.17 ; 5864,1296.17 5864,1873.33 ; 5864,1873.33 5864,2450.5 ; 5864,2450.5 5864,3027.67 ; 5864,3027.67 5864,3625.83
  other v1: 831,1161
5VOUT: J1.2
\MCLR: J16.1 J19.1 R30.2 U4.13 | length 1943.2
  Top Layer w8: J16.1@3114,3717 3168,3717 3191,3694 v1(3191,3328) v1@3185,3328 ; J19.1@3224,4230.76 3229,4225.76 3229,3775 v1(3257,3747) ; R30.2@3368.5,2980 3368.5,2891.07 3384,2875.57 3384,2857.57 3368.5,2842.07 3368.5,2818.14 3388,2798.64 U4.13@3388,2721.24 ; R30.2@3371,2981.54 3404.69,3015.22 3404.69,3075.92 3426,3097.23 v1(3426,3130)
  Bottom Layer w8: J16.1@3114,3717 3227,3717 v1(3257,3747) ; v1@3185,3328 v1(3191,3328) ; v1@3193,3322 3223.53,3291.47 3370.98,3291.47 3385,3277.46 3385,3213 3426,3172 v1(3426,3130)
ANALOG1: J21.1 U4.22 | length 2424.6
  Top Layer w8: J21.1@2581,4617 2581,4459.46 2642.62,4397.83 2642.62,4008.38 2693,3958 3085.46,3958 3184.5,3858.96 3184.5,3753.04 3237,3700.54 3237,3244 3191,3198 3191,2950 3210,2931 3210,2722.08 U4.22@3210.83,2721.24
ANALOG2: J21.2 U4.23 | length 2479.9
  Top Layer w8: J21.2@2431,4617 2431,4487.19 2624.62,4293.56 2624.62,3997.38 2684.33,3937.67 3080.33,3937.67 3166.5,3851.5 3166.5,3745.59 3218,3694.09 3218,3258 3173,3213 3173,2942.54 3191.15,2924.39 U4.23@3191.15,2721.24
ANALOG3: J21.3 U4.33 | length 3342.2
  Top Layer w8: J21.3@2281,4617 2281,4231 2243,4193 2067,4193 2020,4146 2020,3117 2560.46,3117 2648,3029.46 2648,2510.46 2965.26,2510.46 2977.23,2522.43 U4.33@3090.76,2522.43
ANALOG4: J21.4 U4.34 | length 3211
  Top Layer w8: J21.4@2131,4617 2131,4631 2133,4633 2133,4313 2002,4182 2002,3106.54 2009.54,3099 2553,3099 2630,3022 2630,2503 2640.54,2492.46 2972.72,2492.46 2983,2502.74 3052.76,2502.74
ANALOG5: J21.5 U4.43 | length 3303.8
  Top Layer w8: J21.5@1981,4617 1984,4614 1984,3099.09 2002.09,3081 2368,3081 2477,2972 2477,2330 2498.5,2308.5 3030.5,2308.5 3047.57,2325.57 U4.43@3058,2325.57
ANALOG6: J21.6 U4.44 | length 3420.2
  Top Layer w8: J21.6@1831,4617 1831,4307.37 1966,4172.37 1966,3091.63 1994.63,3063 2360.54,3063 2459,2964.54 2459,2322.54 2491.04,2290.5 3034.96,2290.5 ; 3035.23,2290.23 3050.89,2305.89 U4.44@3090.76,2305.89
AUX_INT: J22.2 U4.66 | length 2655.3
  Top Layer w8: U4.66@3447.06,2126.76 3447.06,2078.06 3422,2053 3422,1842.46 3661,1603.46 3661,1237.32 3644,1220.32 v1(3644,1015)
  Bottom Layer w8: v1(3644,1015) 4167,492 4167,292 4201,258 4493,258 4463,288 J22.2@4463,393
AUX_PWM: J22.1 U4.81 | length 2266.4
  Top Layer w8: 3723.24,2286.2 3728.44,2281 3866,2281 v1(3876,2271)
  Bottom Layer w8: v1@3876,2257 3982.46,2257 4313,1926.46 J22.1@4313,393
CAN_RX: J20.1 TP15.1 U4.90 | length 3753.5
  Top Layer w8: TP15.1@2539,798 2539,263 2575,227 J20.1@2644,227 ; U4.90@3685.24,2463.37 3958.63,2463.37 3971,2451 v1(4025,2451)
  Bottom Layer w8: TP15.1@2511,777 2739,777 2793,831 2793,1430.54 3009.5,1647.04 3009.5,1880.98 3025.02,1896.5 3044.96,1896.5 3117.5,1969.04 3117.5,1992.5 3122,1997 3121.41,1997.59 3286.82,2163 3479.46,2163 3588.46,2272 3814,2272 3851,2309 3929,2309 4025,2405 v1(4025,2451) ; J20.1@2611.29,255.5 J20.1@2627.5,255.5
CAN_TX: J20.2 TP16.1 U4.89 | length 3342.6
  Top Layer w8: J20.2@2644,327 2644,877 2646,875 TP16.1@2646,1031 ; U4.89@3685.24,2443.69 3688.02,2446.46 3721.77,2446.46 3723.68,2448.37 3948.63,2448.37 v1(3985,2412)
  Bottom Layer w8: TP16.1@2650,1019 2650,1108 2749,1207 2749,1412 2991.5,1654.5 2991.5,1888.43 3017.57,1914.5 3037.5,1914.5 3099.5,1976.5 3099.5,2139.96 3118.54,2159 3257.37,2159 3279.37,2181 3472,2181 3586,2295 3797.21,2295 3892.21,2390 3963,2390 v1(3985,2412)
EREF_CLK: R16.2 U1.34 U4.14 | length 2902.9
  Top Layer w8: R16.2@1360,1780.46 1372.54,1780.46 1375,1778 1375,2084 1419.1,2128.1 U1.34@1561.55,2128.1 ; v1@3344,2866 v1(3350,2866) ; v1@3348.43,2857 3348.43,2817 3368.32,2797.11 U4.14@3368.32,2721.24
  Bottom Layer w8: v1(1417,2125) 1424,2132 1654,2132 2283,2761 2416,2761 ; 2416,2759 2994.09,2759 3082.09,2847 3329,2847 v1@3339,2857
ERXD0: R14.1 U4.41 | length 1526.4
  Top Layer w8: R14.1@2114.46,1752 2121.46,1759 2191,1759 2191,1969 2204,1982 v1@2379,1982 ; v1(2649,2371) 2719,2371 2737,2353 3018,2353 3029.94,2364.94 U4.41@3058,2364.94
  Bottom Layer w8: v1(2378,1983) 2378,2000 2423,2045 2423,2282.46 2526.54,2386 2634,2386 2655,2365 2655,2377 v1(2649,2371)
ERXD1: R15.1 U4.42 | length 1432.1
  Top Layer w8: R15.1@2119,1834 2156,1834 2172,1850 2172,2016 v1(2441,2016) ; v1@2695,2338 3037,2338 3044.26,2345.26 U4.42@3090.76,2345.26
  Bottom Layer w8: v1(2441,2016) 2441,2275 2503,2337 v1@2695,2337
  other v1: 2695,2343
ERXERR: U1.41 U4.35 | length 1978
  Top Layer w8: 1691.47,1999.56 1691.47,1955.53 1725,1922 v1(1745,1922) ; v1(2679,2447) 2701,2469 2794.37,2469 2799.83,2474.46 2980.17,2474.46 2988.77,2483.06 U4.35@3090.76,2483.06
  Bottom Layer w8: v1@1746,1930 1746,1876 1768,1854 2306.54,1854 2351.5,1898.96 2351.5,1998.96 2405,2052.46 2405,2289.91 2563.09,2448 v1@2679,2448